# Altium PCB MB525.PCBDOC (part 1 of 3)
Units mil, origin at the board's own origin, x right, y up, seen from the top; angles counter-clockwise.
Board outline 4505 x 6805 mil, 4 copper layers (TopLayer, GND, VCC, BottomLayer); 281 components, 230 nets, 1107 pads, 580 vias.
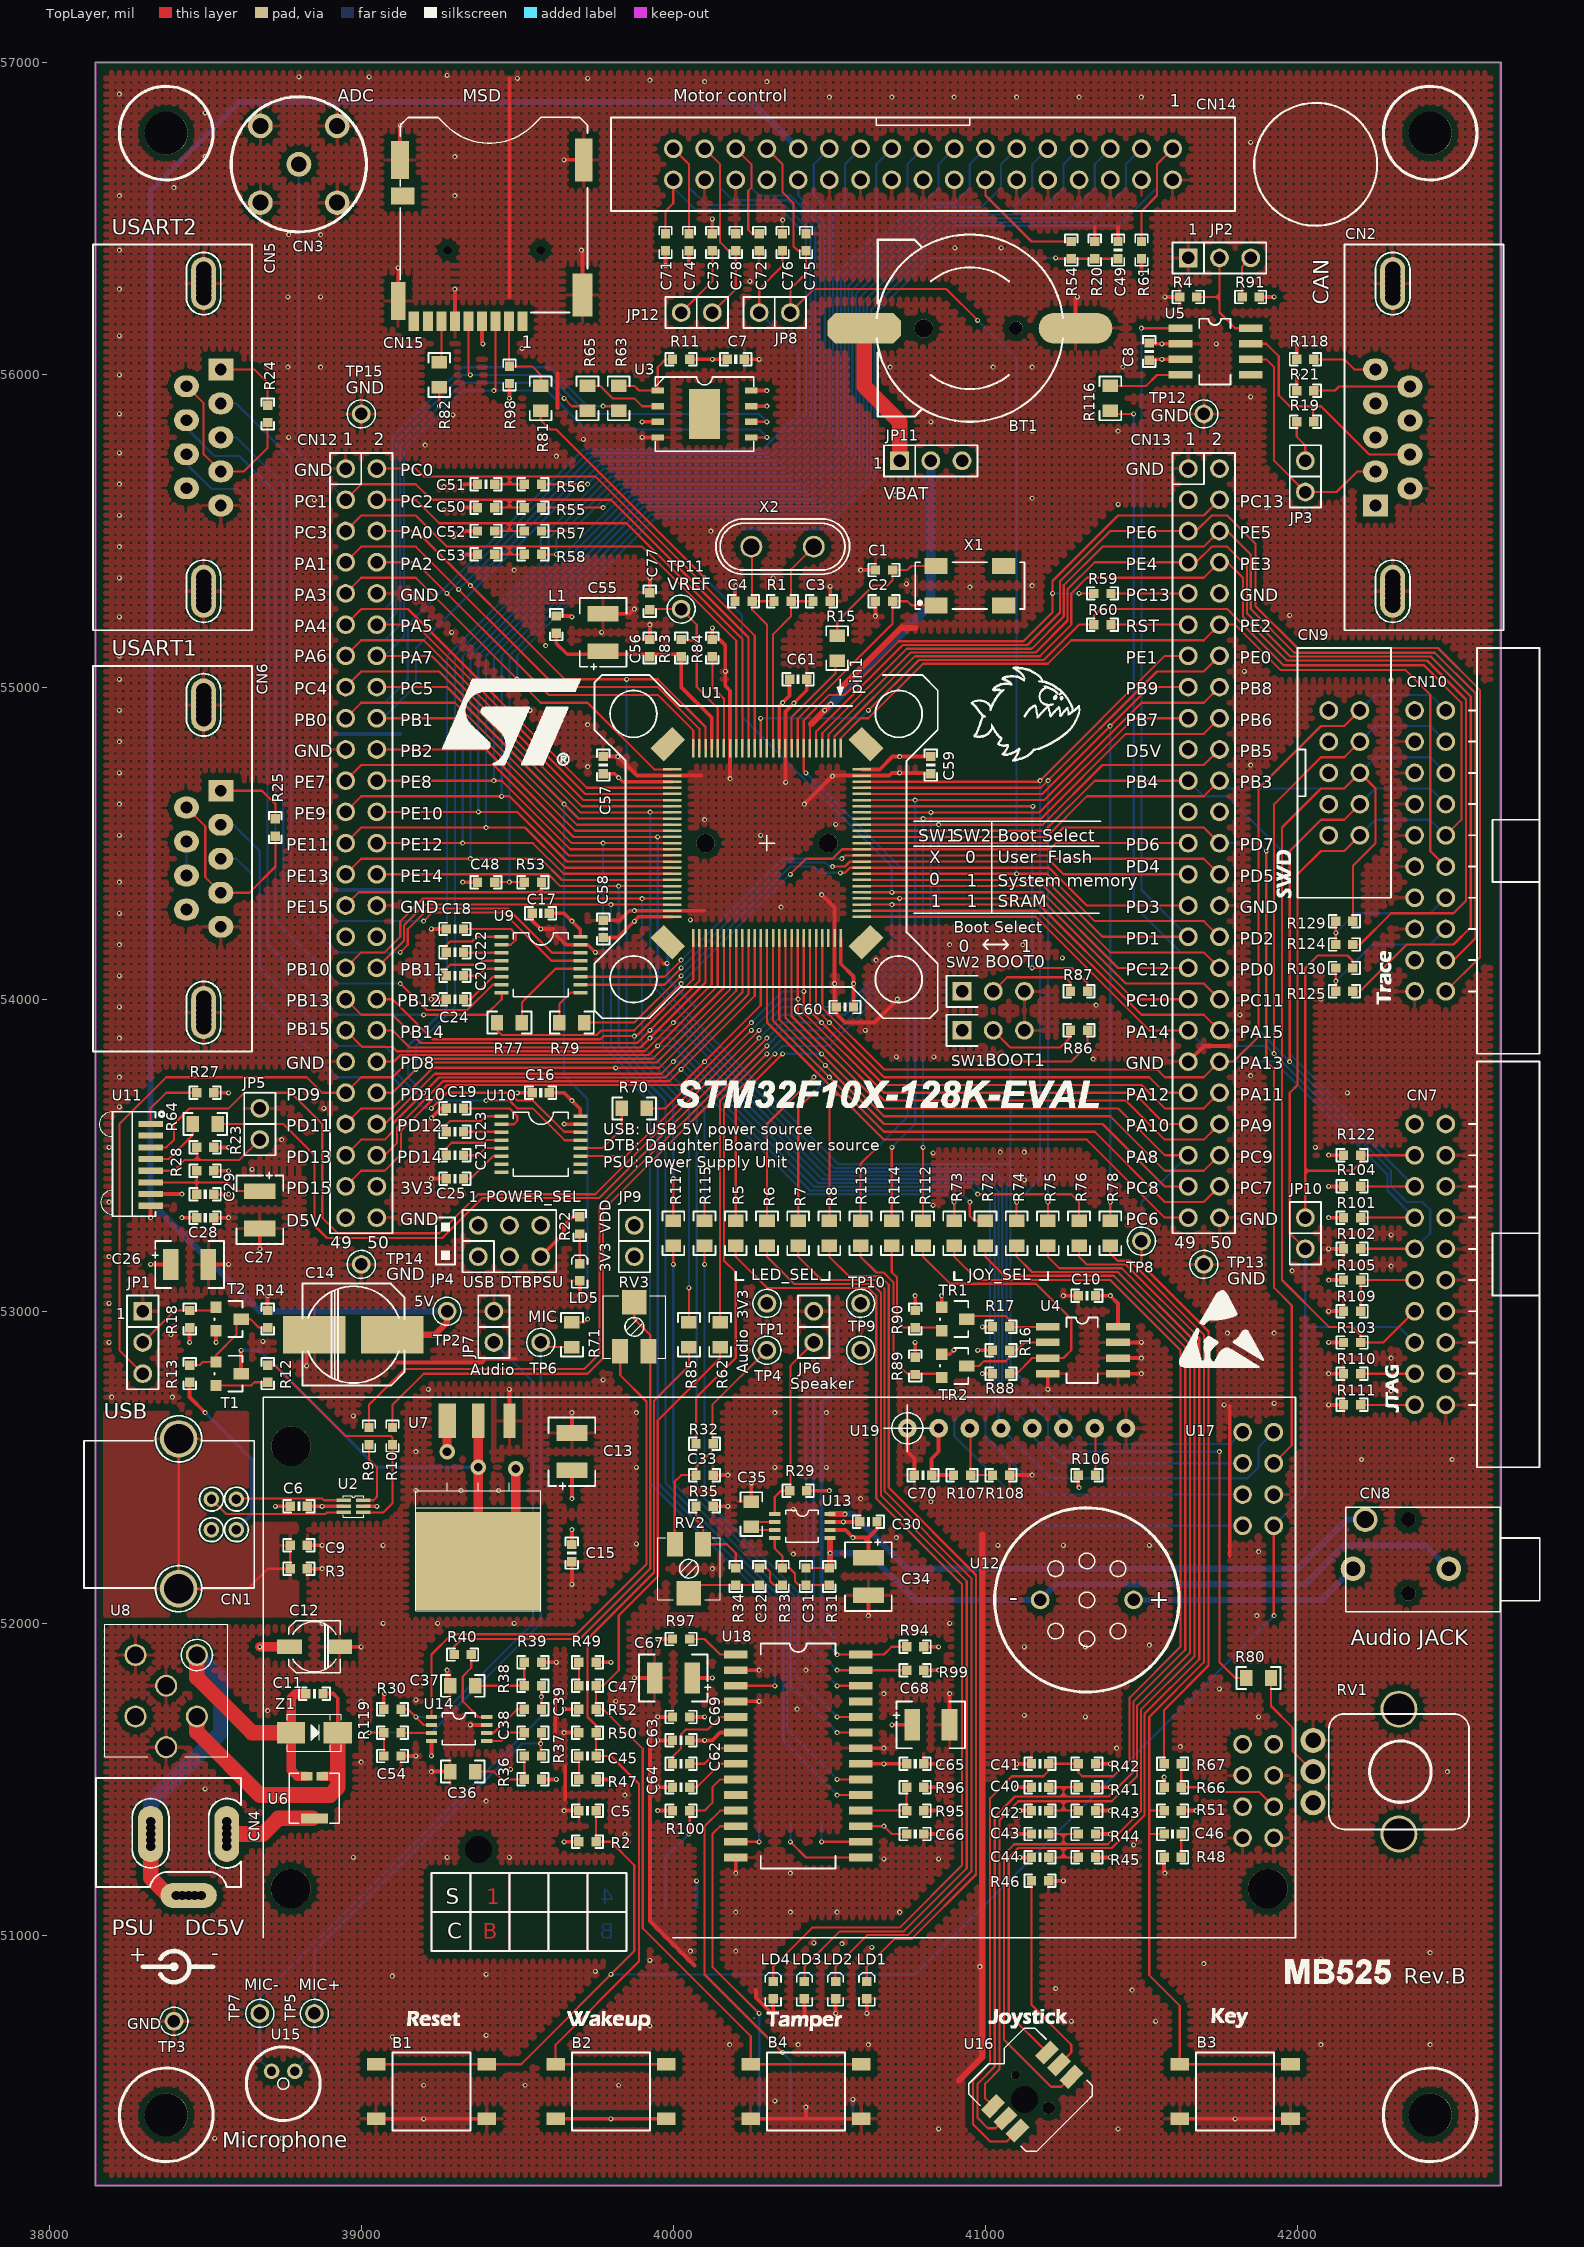
[diagram p0: TopLayer view]
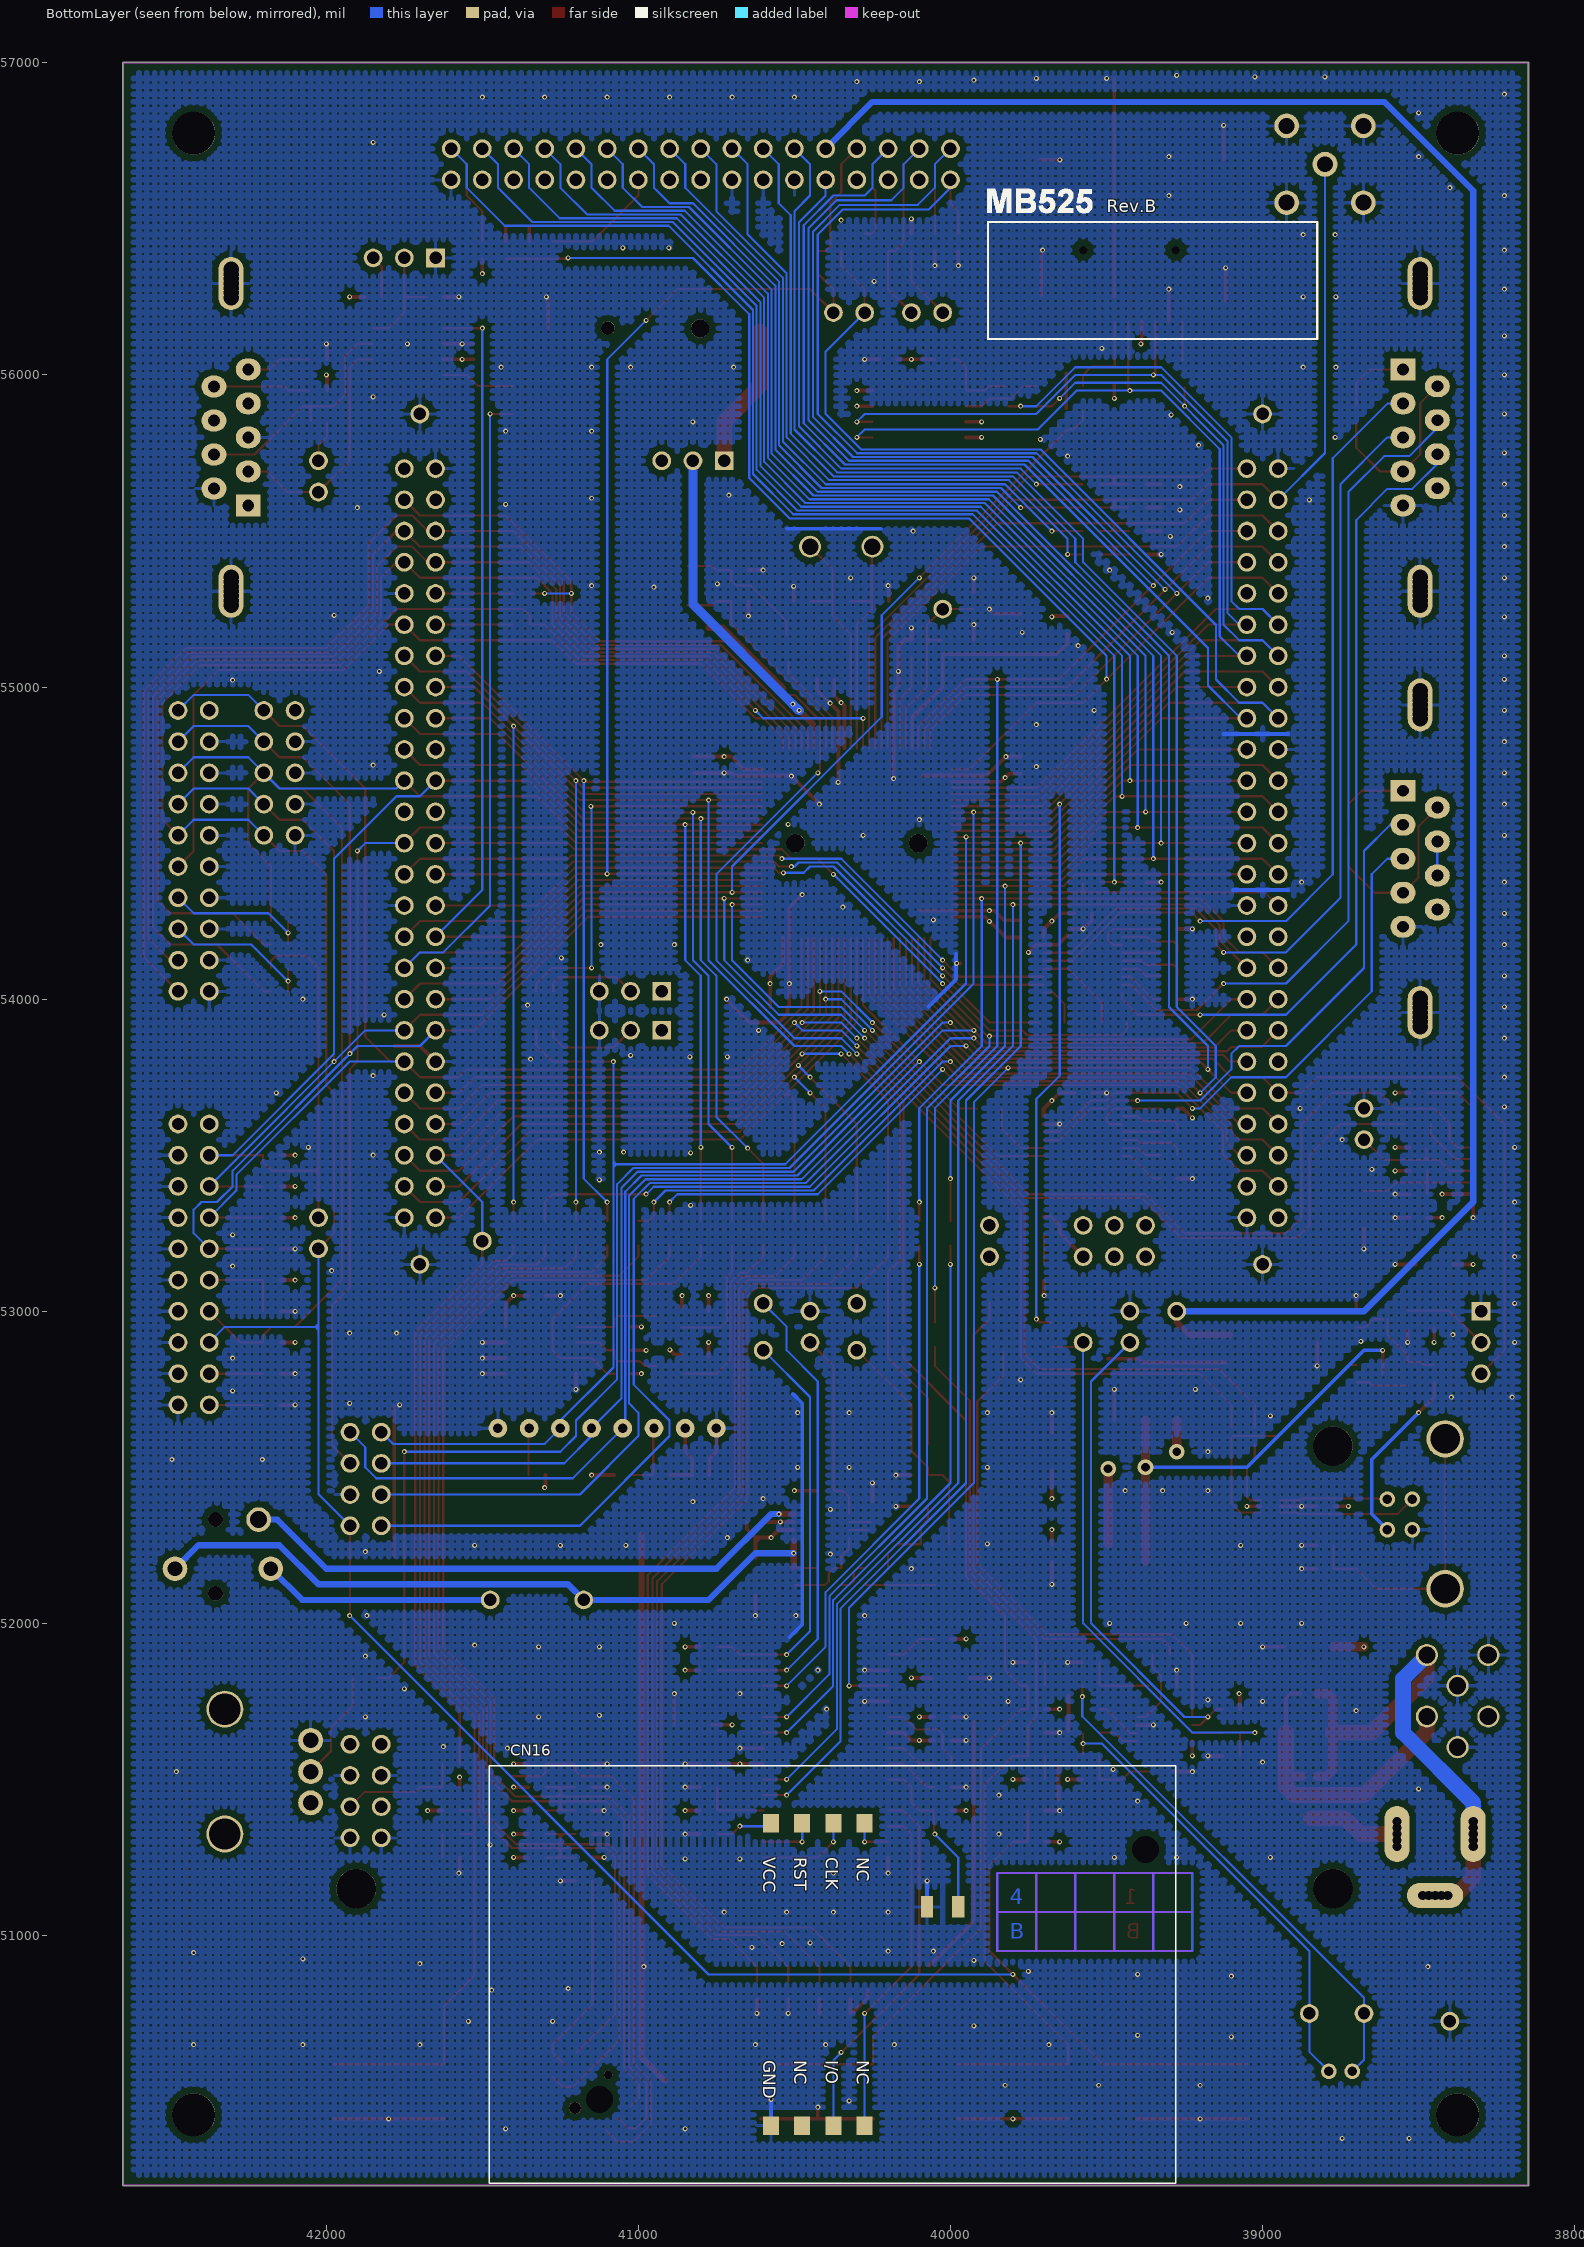
[diagram p1: BottomLayer view, seen from below]
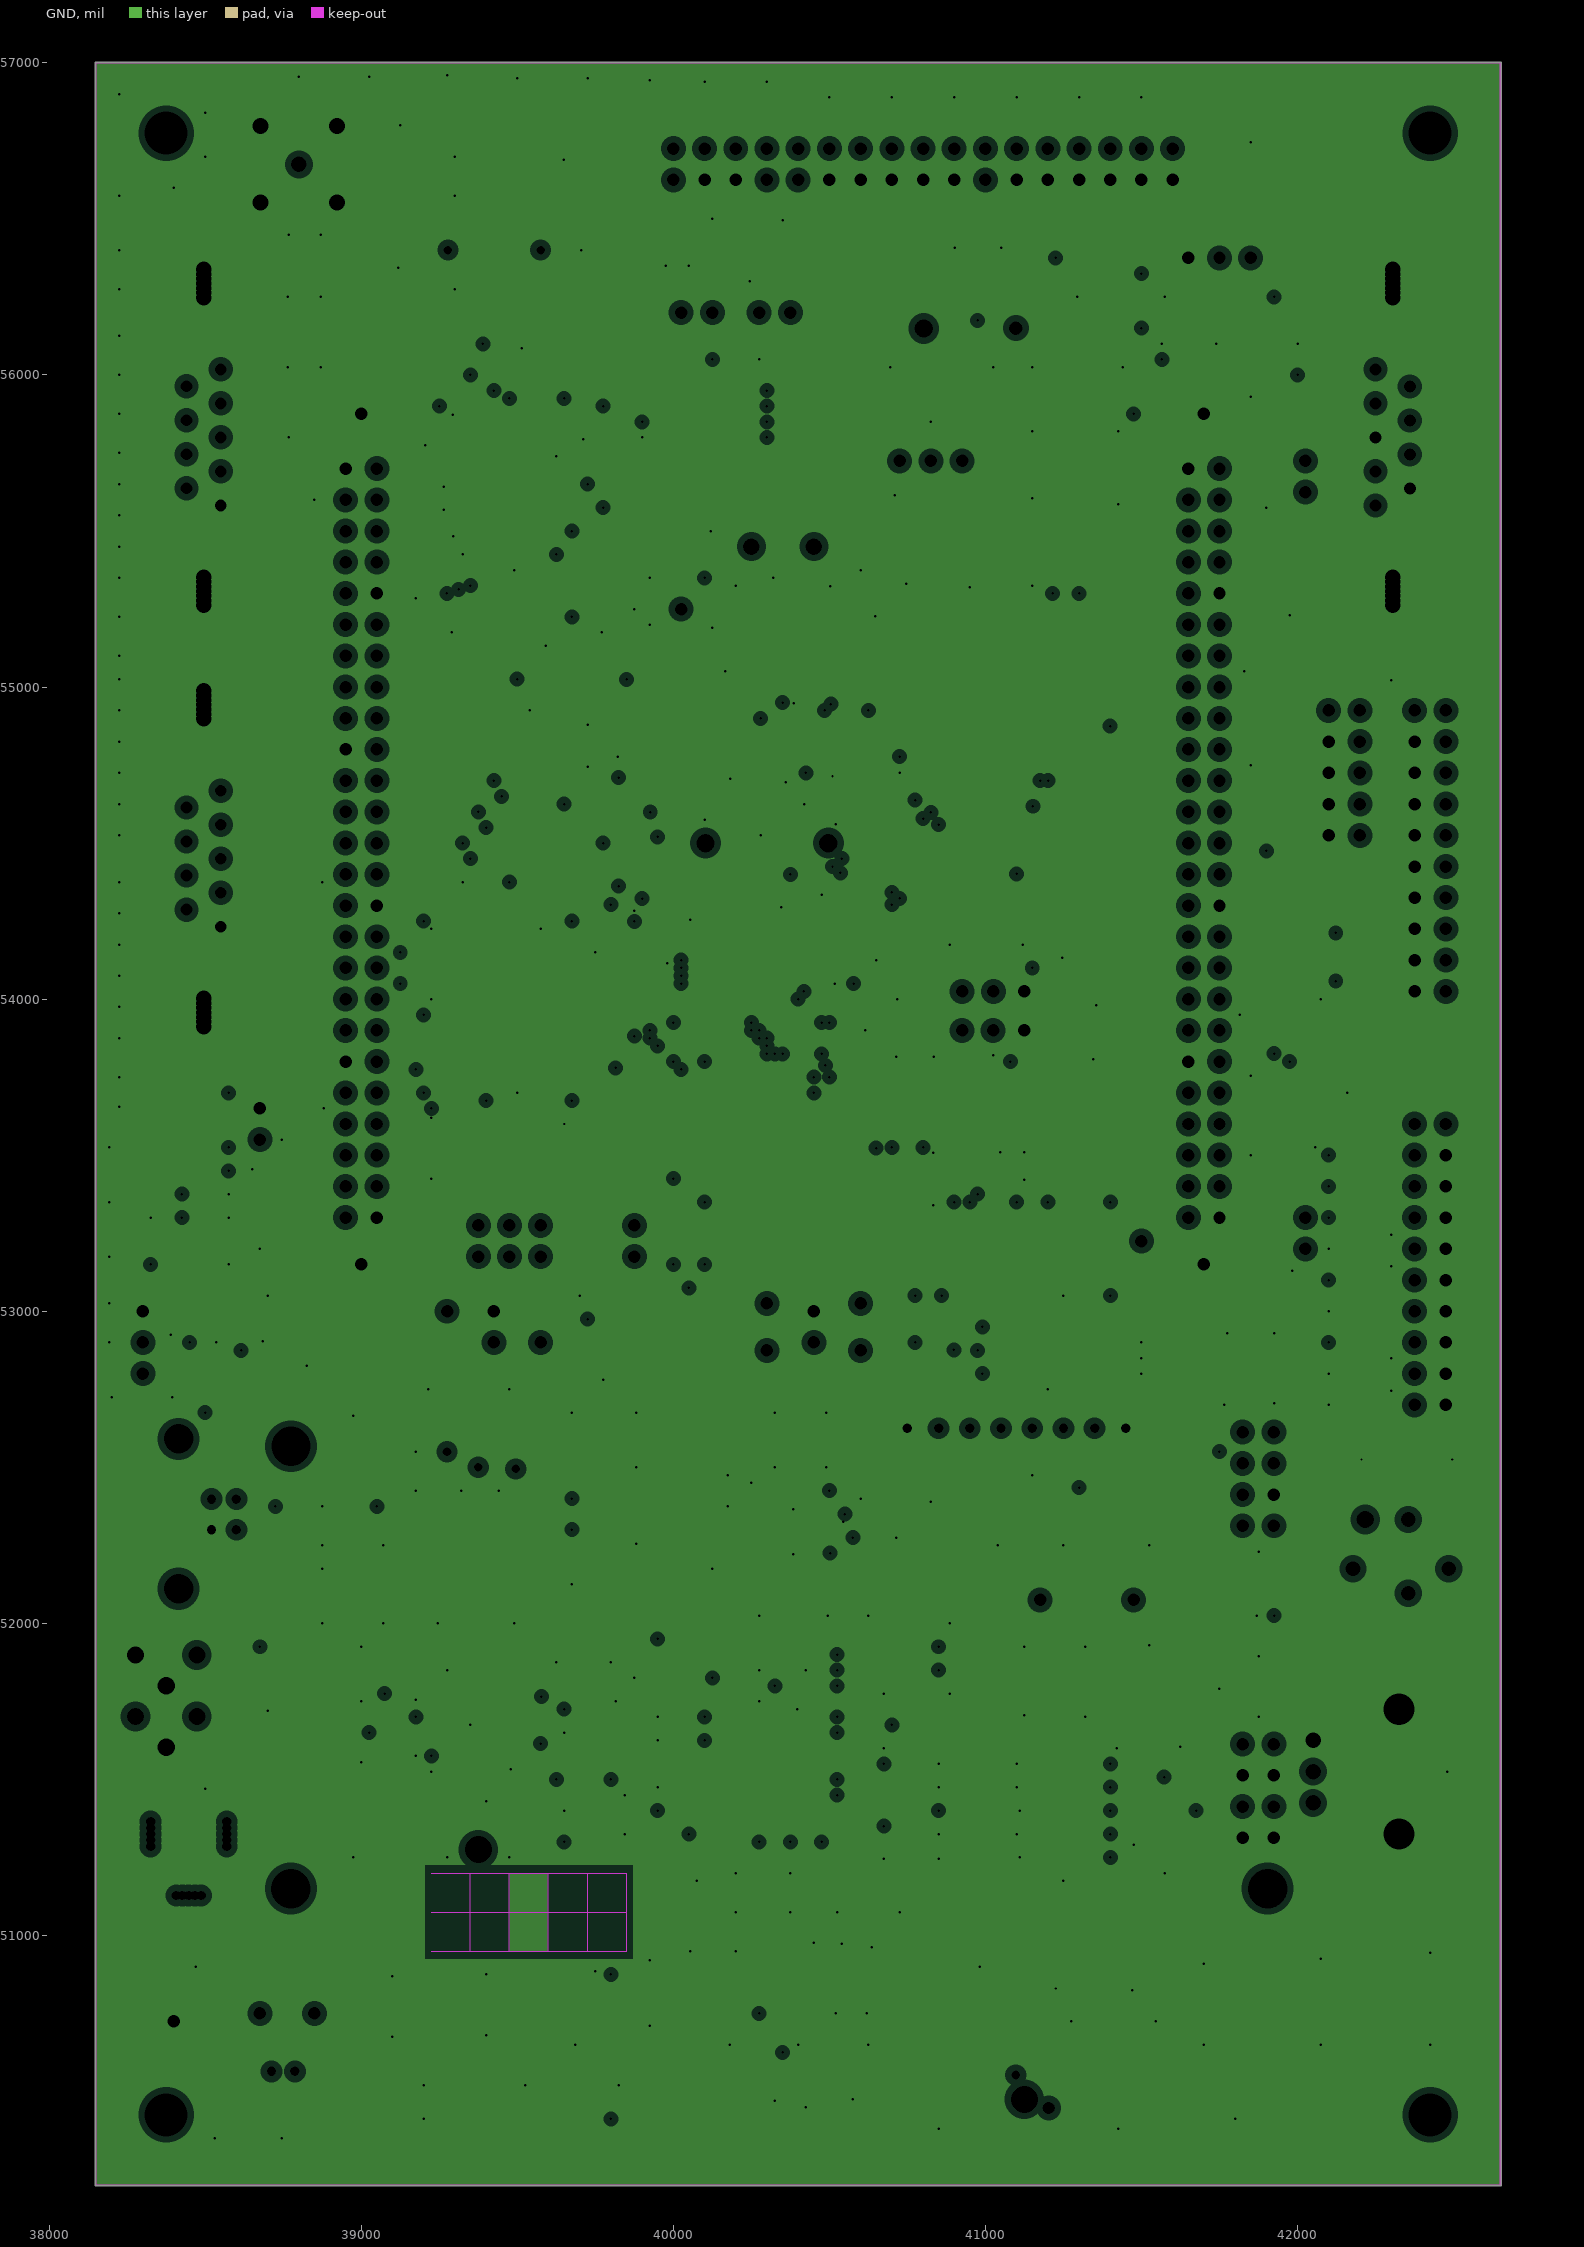
[diagram p2: GND, clearances drawn from the general rule]
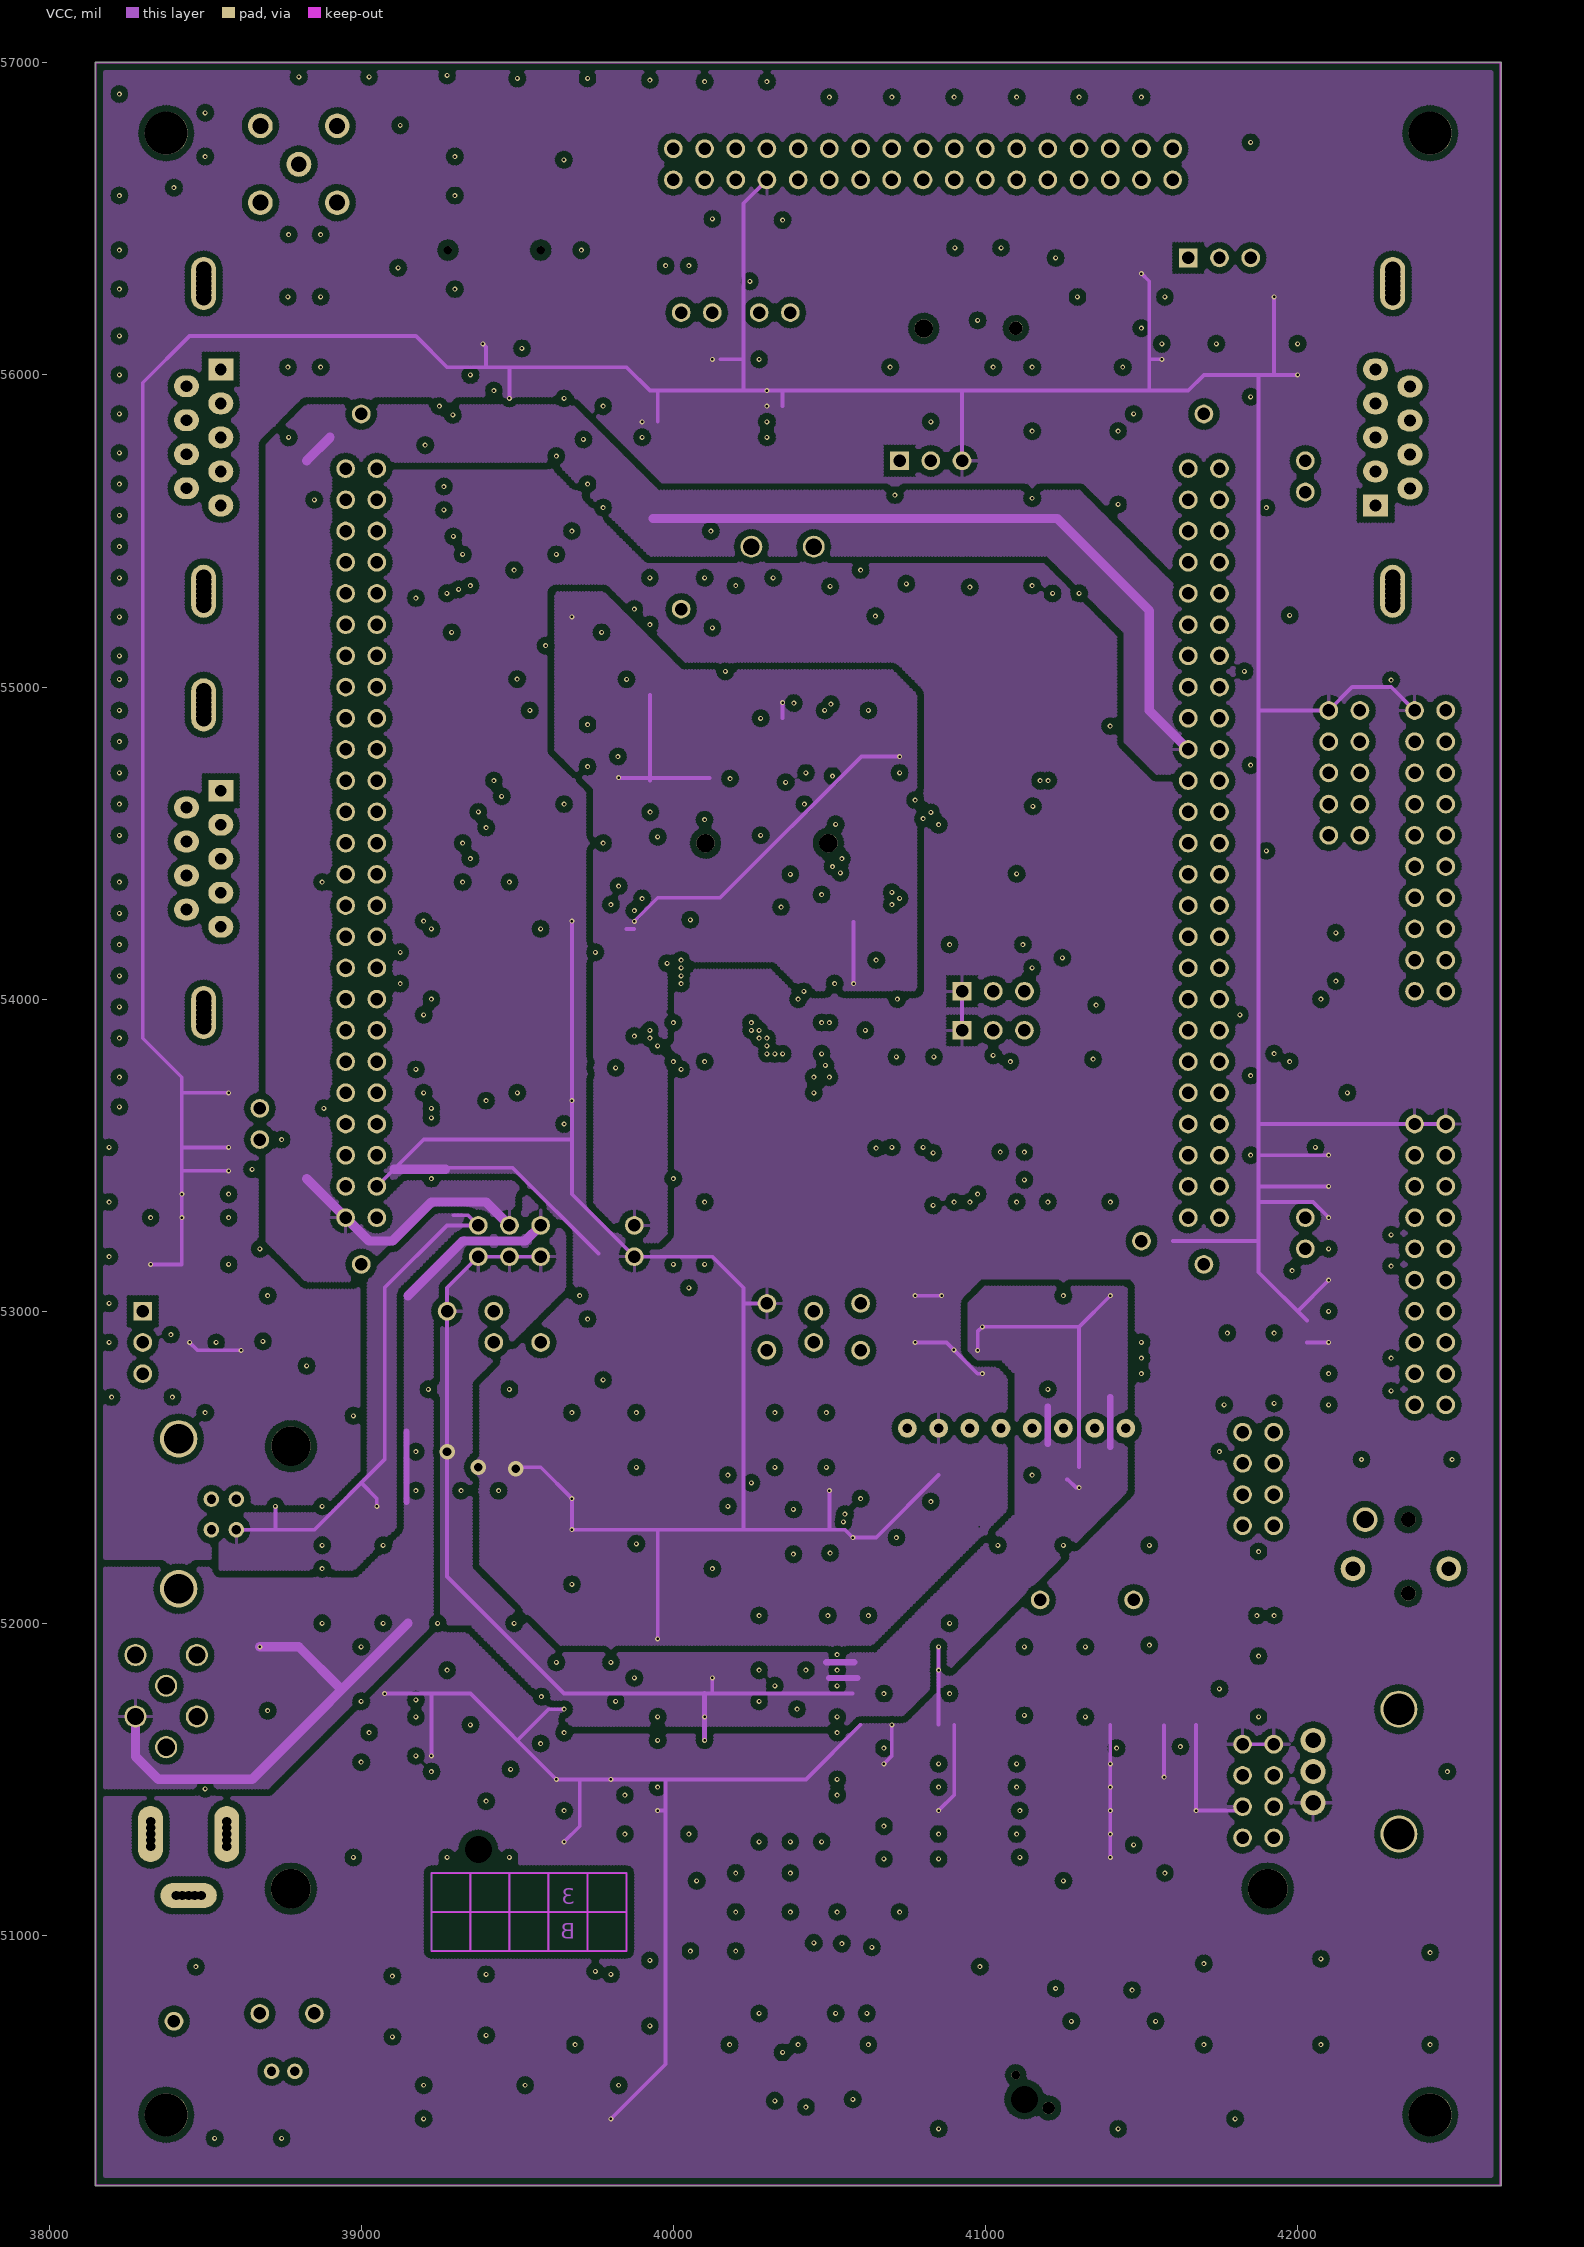
[diagram p3: VCC]

## Layer stack, top to bottom
TopLayer: signal copper 1.4
Dielectric: core 12.6, FR-4, Dk 4.8
GND: plane copper 1.4, net GND
Dielectric: prepreg 12.6, FR-4, Dk 4.8
VCC: signal copper 1.4
Dielectric: core 12.6, FR-4, Dk 4.8
BottomLayer: signal copper 1.4

## Board outline
38147.5,50197.5 42652.5,50197.5 42652.5,57002.5 38147.5,57002.5

## Design rules (kind name [scope] priority, off if disabled: settings)
Clearance Clearance_1 [(InPoly)] p1: gap=20
Clearance [All] p2: gap=5
ComponentClearance [All] p1 off: gap=10 collisioncheckmode=0
PlaneClearance [All] p1: clearance=20
PlaneConnect [All] p1: planeconnectstyle=Relief reliefexpansion=20 reliefentries=4 reliefconductorwidth=10 reliefairgap=10
PolygonConnect [All] p1: connectstyle=Relief reliefconductorwidth=10 reliefentries=4 polygonreliefangle="90 Angle"
RoutingLayers [All] p1: top layer_v5=TRUE mid layer 1_v5=FALSE bottom layer_v5=TRUE
RoutingVias [All] p1: holewidth=8 width=16 viastyle="Through Hole" minholewidth=5 minwidth=8 maxholewidth=28 maxwidth=50
SolderMaskExpansion [All] p1: expansion=4
TestPointUsage [All] p1: valid=0 allowmultiple=FALSE
Testpoint [All] p1: side=15 testpointundercomponent=TRUE minsize=40 maxsize=100 preferedsize=60 minholesize=20 maxholesize=40 preferedholesize=32 testpointgrid=1 style=1023 order=1234567890
Width Width_6 [InNet('U5V')] p1: maxlimit=300 minlimit=7 preferedwidth=12
Width Width_5 [InNet('GND')] p2: maxlimit=300 minlimit=7 preferedwidth=12
Width Width_8 [InNet('VDDA')] p3: maxlimit=300 minlimit=7 preferedwidth=12
Width Width_7 [InNet('VDD')] p4: maxlimit=300 minlimit=7 preferedwidth=12
Width Width_4 [InNet('E5V')] p5: maxlimit=300 minlimit=7 preferedwidth=20
Width Width_1 [InNet('+3V3')] p6: maxlimit=300 minlimit=7 preferedwidth=12
Width Width_2 [InNet('+5V')] p7: maxlimit=300 minlimit=7 preferedwidth=20
Width Width_3 [InNet('D5V')] p8: maxlimit=300 minlimit=7 preferedwidth=30
Width [All] p9: maxlimit=300 minlimit=5 preferedwidth=7
14 further rules are at their usual default settings.

## Classes and differential pairs
component class Debug: CN7 CN9 CN10 CN11 JP10 R101 R102 R103 R104 R105 R109 R110 R111
component class SD&SmartCard: C62 C63 C64 C65 C66 C67 C68 C69 CN15 CN16 R81 R82 R94 R95 R96 R97 R98 R99 R100 R115 R117 TP9 TP10 U18
component class MC&Extension: C48 C49 C50 C51 C52 C53 C71 C72 C73 C74 C75 CN12 CN13 CN14 JP8 R53 R54 R55 R56 R57 R58 R59 R60 R61
component class LCD&Joystick: B1 B2 B3 C40 C41 C42 C43 C44 C45 C46 C47 C70 R41 R42 R43 R44 R45 R46 R47 R48 R49 R50 R51 R52 R62 R72 R73 R74 R75 R76 R78 R85 R92 R93 R106 R107 R108 R120 R121 U16 U17 U19
component class Audio: C30 C31 C32 C33 C34 C35 C36 C37 C38 C39 C54 CN8 JP6 JP7 R29 R30 R31 R32 R33 R34 R35 R36 R37 R38 R39 R40 R71 R119 RV2 RV3 TP4 TP5 TP6 TP7 U12 U13 U14 U15
component class RS232&IrDA: C16 C17 C18 C19 C20 C21 C22 C23 C24 C25 C26 C27 C28 C29 CN5 CN6 JP5 R23 R24 R25 R27 R28 R64 R70 R77 R79 U9 U10 U11
component class Power: C11 C12 C13 C14 C15 CN4 JP4 LD5 R22 TP1 TP2 TP3 U6 U7 U8 Z1
component class Peripherals: C6 C7 C8 C9 C10 CN1 CN2 CN3 JP1 JP2 JP3 LD1 LD2 LD3 LD4 R3 R4 R5 R6 R7 R8 R9 R10 R11 R12 R13 R14 R16 R17 R18 R19 R20 R21 R63 R65 R66 R67 R68 R69 R80 R88 R89 R90 R91 R112 R113 R114 R116 R118 RV1 T1 T2 TR1 TR2 U2 U3 U4 U5
component class MCU: B1 BT1 C1 C2 C3 C4 C5 C55 C56 C57 C58 C59 C60 C61 JP9 L1 R1 R2 R15 R26 R83 R84 R86 R87 SW1 SW2 TP8 U1 X1 X2
component class MotorCtrl: C48 C49 C50 C51 C52 C53 C71 C72 C73 C74 C75 C76 CN14 JP8 JP12 R20 R53 R54 R55 R56 R57 R58 R61
component class JTAG&SWD: CN7 CN9 CN10 JP10 R101 R102 R103 R104 R105 R109 R110 R111 R122 R124 R125 R129 R130
component class Extension: CN12 CN13 R59 R60
net class PA[0..15]: PA0 PA1 PA2 PA3 PA4 PA5 PA6 PA7 PA8 PA9 PA10 PA11 PA12 PA13 PA14 PA15 PA[0..15]0 PA[0..15]1 PA[0..15]2 PA[0..15]3 PA[0..15]4 PA[0..15]5 PA[0..15]6 PA[0..15]7 PA[0..15]8 PA[0..15]9 PA[0..15]10 PA[0..15]11 PA[0..15]12 PA[0..15]13 PA[0..15]14 PA[0..15]15
net class PB[0..15]: PB0 PB1 PB2 PB3 PB4 PB5 PB6 PB7 PB8 PB9 PB10 PB11 PB12 PB13 PB14 PB15 PB[0..15]0 PB[0..15]1 PB[0..15]2 PB[0..15]3 PB[0..15]4 PB[0..15]5 PB[0..15]6 PB[0..15]7 PB[0..15]8 PB[0..15]9 PB[0..15]10 PB[0..15]11 PB[0..15]12 PB[0..15]13 PB[0..15]14 PB[0..15]15
net class PC[0..15]: PC0 PC1 PC2 PC3 PC4 PC5 PC6 PC7 PC8 PC9 PC10 PC11 PC12 PC13 PC14 PC15 PC[0..15]0 PC[0..15]1 PC[0..15]2 PC[0..15]3 PC[0..15]4 PC[0..15]5 PC[0..15]6 PC[0..15]7 PC[0..15]8 PC[0..15]9 PC[0..15]10 PC[0..15]11 PC[0..15]12 PC[0..15]13 PC[0..15]14 PC[0..15]15
net class PD[0..15]: PD0 PD1 PD2 PD3 PD4 PD5 PD6 PD7 PD8 PD9 PD10 PD11 PD12 PD13 PD14 PD15 PD[0..15]0 PD[0..15]1 PD[0..15]2 PD[0..15]3 PD[0..15]4 PD[0..15]5 PD[0..15]6 PD[0..15]7 PD[0..15]8 PD[0..15]9 PD[0..15]10 PD[0..15]11 PD[0..15]12 PD[0..15]13 PD[0..15]14 PD[0..15]15
net class PE[0..15]: PE0 PE1 PE2 PE3 PE4 PE5 PE6 PE7 PE8 PE9 PE10 PE11 PE12 PE13 PE14 PE15 PE[0..15]0 PE[0..15]1 PE[0..15]2 PE[0..15]3 PE[0..15]4 PE[0..15]5 PE[0..15]6 PE[0..15]7 PE[0..15]8 PE[0..15]9 PE[0..15]10 PE[0..15]11 PE[0..15]12 PE[0..15]13 PE[0..15]14 PE[0..15]15

## Components (designator, comment, footprint, x,y, rotation, side; value= is the part's Value field where it differs from the comment)
B1 "RESET" PB10 39225,50500 r90 top
B2 "WKUP" PB10 39800,50500 r90 top
B3 "USER" PB10 41800,50500 r90 top
B4 "Tamper" PB10 40425,50500 r90 top
BT1 "CR1220 holder" LI1220_1 40950,56150 r270 top
C1 "10pF" 0603 40675,55375 r180 top
C2 "10pF" 0603 40675,55275 r180 top
C3 "20pF" 0603 40475,55275 r0 top
C4 "20pF" 0603 40225,55275 r180 top
C5 "100nF" 0603P 39725,51400 r0 top
C6 "100nF" 0603P 38800,52375 r180 top
C7 "100nF" 0603P 40200,56050 r180 top
C8 "100nF" 0603P 41525,56075 r270 top
C9 "4.7nF" 0603 38800,52250 r180 top
C10 "100nF" 0603P 41325,53050 r0 top
C11 "100nF" 0603P 38850,51775 r180 top
C12 "10uF" C160M 38850,51925 r180 top
C13 "10uF" TAN-B 39675,52550 r90 top
C14 "470uF" C310M 38975,52925 r0 top
C15 "100nF" 0603P 39675,52225 r270 top
C16 "100nF" 0603P 39575,53700 r180 top
C17 "100nF" 0603P 39575,54275 r180 top
C18 "100nF" 0603P 39300,54225 r0 top
C19 "100nF" 0603P 39300,53650 r0 top
C20 "100nF" 0603P 39300,54075 r0 top
C21 "100nF" 0603P 39300,53500 r0 top
C22 "100nF" 0603P 39300,54150 r0 top
C23 "100nF" 0603P 39300,53575 r0 top
C24 "100nF" 0603P 39300,54000 r0 top
C25 "100nF" 0603P 39300,53425 r0 top
C26 "4.7uF" TAN-B 38450,53150 r0 top
C27 "4.7uF" TAN-B 38675,53325 r270 top
C28 "0.1uF" 0603P 38500,53300 r0 top
C29 "0.1uF" 0603P 38500,53375 r0 top
C30 "100nF" 0603P 40625,52325 r0 top
C31 "470pF" 0603 40425,52150 r90 top
C32 "150nF" 0603 40275,52150 r90 top
C33 "33nF" 0603 40100,52475 r180 top
C34 "100uF" TAN-B 40625,52150 r270 top
C35 "2.2uF" 0805 40250,52350 r180 top
C36 "2.2uF" 0805 39325,51525 r270 top
C37 "2.2uF" 0805 39325,51800 r270 top
C38 "1uF" 0603 39550,51650 r180 top
C39 "1uF" 0603 39550,51725 r180 top
C40 "100nF" 0603P 41175,51475 r0 top
C41 "100nF" 0603P 41175,51550 r0 top
C42 "100nF" 0603P 41175,51400 r0 top
C43 "100nF" 0603P 41175,51325 r0 top
C44 "100nF" 0603P 41175,51250 r0 top
C45 "100nF" 0603P 39725,51575 r0 top
C46 "100nF" 0603P 41600,51325 r180 top
C47 "100nF" 0603P 39725,51800 r0 top
C48 "1nF" 0603 39400,54375 r0 top
C49 "100nF" 0603P 41425,56400 r270 top
C50 "do not fit" 0603 39400,55575 r0 top
C51 "100nF" 0603P 39400,55650 r0 top
C52 "do not fit" 0603 39400,55500 r0 top
C53 "do not fit" 0603 39400,55425 r0 top
C54 "do not fit" 0603 39100,51575 r0 top
C55 "10uF" TAN-B 39775,55175 r90 top
C56 "10nF" 0603 39925,55125 r90 top
C57 "100nF" 0603P 39775,54750 r90 top
C58 "100nF" 0603P 39775,54225 r90 top
C59 "100nF" 0603P 40825,54750 r270 top
C60 "100nF" 0603P 40550,53975 r180 top
C61 "100nF" 0603P 40400,55025 r0 top
C62 "100nF" 0603P 40025,51550 r180 top
C63 "100nF" 0603P 40025,51625 r180 top
C64 "100nF" 0603P 40025,51475 r180 top
C65 "100nF" 0603P 40775,51550 r0 top
C66 "100nF" 0603P 40775,51325 r180 top
C67 "47uF" TAN-B 40000,51825 r180 top
C68 "47uF" TAN-B 40825,51675 r0 top
C69 "330nF" 0603 40025,51700 r180 top
C70 "100nF" 0603P 40800,52475 r180 top
C71 "do not fit" 0603 39975,56425 r90 top
C72 "do not fit" 0603 40275,56425 r90 top
C73 "10nF" 0603 40125,56425 r270 top
C74 "do not fit" 0603 40050,56425 r90 top
C75 "do not fit" 0603 40425,56425 r270 top
C76 "do not fit" 0603 40350,56425 r270 top
C77 "10nF" 0603 39925,55275 r90 top
C78 "do not fit" 0603 40200,56425 r270 top
CN1 "USB-typeB connector" USB-B 38600,52300 r270 top
CN2 "DB9-male CAN connector" DB9/M 42250,55800 r270 top
CN3 "VB334" VB334 38800,56675 r270 top
CN4 "DC-10B" DC10B 38325,51325 r0 top
CN5 "DB9-male UART2" DB9/M 38550,55800 r90 top
CN6 "DB9-male UART1" DB9/M 38550,54450 r90 top
CN7 "JTAG" IDC20L 42375,53600 r270 top locked
CN8 "ST-613" PJST-613 42650,52175 r180 top
CN9 "SWD" IDC10S 42100,54925 r0 top
CN10 "Trace" IDC20L 42375,54925 r270 top
CN12 "Header 25X2" 2*25P 38950,55700 r0 top
CN13 "Header 25X2" 2*25P 41650,55700 r0 top
CN14 "MC_connector" IDC34S 41600,56725 r270 top locked
CN15 "PJS008-2000" MSD(PJS008) 39575,56400 r90 top
CN16 "C816" SAM(C816) 40425,50875 r270 bottom
JP1 "" SIP3 38300,53000 r270 top
JP2 "" SIP3 41650,56375 r0 top
JP3 "" SIP2 42025,55725 r270 top
JP4 "" 2*3P 39375,53175 r90 top
JP5 "" SIP2 38675,53550 r90 top
JP6 "" SIP2 40450,52900 r90 top
JP7 "" SIP2 39425,52900 r90 top
JP8 "" SIP2 40375,56200 r180 top
JP9 "" SIP2 39875,53175 r90 top
JP10 "" SIP2 42025,53300 r270 top
JP11 "" SIP3 40725,55725 r0 top
JP12 "" SIP2 40125,56200 r180 top
L1 "BEAD" 0603 39625,55200 r270 top
LD1 "red" D0603 40620,50825 r0 top
LD2 "red" D0603 40520,50825 r0 top
LD3 "red" D0603 40420,50825 r0 top
LD4 "red" D0603 40320,50825 r0 top
LD5 "red" D0603 39700,53125 r0 top
R1 "1M" 0603 40350,55275 r0 top
R2 "10K" 0603 39725,51300 r180 top
R3 "1M" 0603 38800,52175 r180 top
R4 "10K" 0603 41650,56250 r180 top
R5 "600" 0805 40200,53250 r180 top
R6 "600" 0805 40300,53250 r180 top
R7 "600" 0805 40400,53250 r180 top
R8 "600" 0805 40500,53250 r180 top
R9 "22" 0603 39025,52600 r90 top
R10 "22" 0603 39100,52600 r90 top
R11 "10K" 0603 40025,56050 r0 top
R12 "1.5K" 0603 38700,52800 r90 top
R13 "10K" 0603 38450,52800 r90 top
R14 "36K" 0603 38700,52975 r90 top
R15 "0" 0805 40525,55125 r0 top
R16 "4K7" 0603 41050,52875 r180 top
R17 "4K7" 0603 41050,52950 r180 top
R18 "47K" 0603 38450,52975 r270 top
R19 "120" 0603 42025,55850 r180 top
R20 "100K" 0603 41350,56400 r270 top
R21 "do not fit" 0603 42025,55950 r0 top
R22 "300" 0603 39700,53275 r90 top
R23 "10K" 0603 38500,53525 r0 top
R24 "do not fit" 0603 38700,55875 r90 top
R25 "do not fit" 0603 38725,54550 r90 top
R27 "5" 0603 38500,53700 r180 top
R28 "47" 0603 38500,53450 r180 top
R29 "10K" 0603 40400,52425 r0 top
R30 "10K" 0603 39100,51725 r0 top
R31 "100K" 0603 40500,52150 r90 top
R32 "1.2K" 0603 40100,52575 r0 top
R33 "22K" 0603 40350,52150 r90 top
R34 "0(don't solder)" 0603 40200,52150 r270 top
R35 "0" 0603 40100,52375 r180 top
R36 "1K" 0603 39550,51500 r0 top
R37 "1K" 0603 39550,51575 r0 top
R38 "1K" 0603 39550,51800 r0 top
R39 "1K" 0603 39550,51875 r180 top
R40 "1K" 0603 39325,51900 r0 top
R41 "10K" 0603 41325,51475 r180 top
R42 "10K" 0603 41325,51550 r0 top
R43 "10K" 0603 41325,51400 r0 top
R44 "10K" 0603 41325,51325 r0 top
R45 "10K" 0603 41325,51250 r0 top
R46 "100" 0603 41175,51175 r180 top
R47 "100" 0603 39725,51500 r180 top
R48 "100" 0603 41600,51250 r0 top
R49 "100" 0603 39725,51875 r180 top
R50 "4K7" 0603 39725,51650 r180 top
R51 "4K7" 0603 41600,51400 r0 top
R52 "4K7" 0603 39725,51725 r180 top
R53 "0" 0603 39550,54375 r0 top
R54 "0" 0603 41275,56400 r270 top
R55 "0" 0603 39550,55575 r0 top
R56 "0" 0603 39550,55650 r180 top
R57 "0" 0603 39550,55500 r0 top
R58 "0" 0603 39550,55425 r0 top
R59 "820" 0603 41375,55300 r0 top
R60 "820" 0603 41375,55200 r180 top
R61 "3.3K" 0603 41500,56400 r270 top
R62 "0" 0805 40150,52925 r180 top
R63 "0" 0805 39825,55925 r0 top
R64 "0" 0805 38500,53600 r90 top
R65 "0" 0805 39725,55925 r180 top
R66 "0" 0603 41600,51475 r180 top
R67 "do not fit" 0603 41600,51550 r0 top
R70 "0" 0805 39875,53650 r90 top
R71 "0" 0805 39675,52925 r0 top
R72 "0" 0805 41000,53250 r180 top
R73 "0" 0805 40900,53250 r180 top
R74 "0" 0805 41100,53250 r180 top
R75 "0" 0805 41200,53250 r180 top
R76 "0" 0805 41300,53250 r180 top
R77 "0" 0805 39475,53925 r270 top
R78 "0" 0805 41400,53250 r180 top
R79 "0" 0805 39675,53925 r90 top
R80 "0" 0805 41875,51825 r90 top
R81 "0" 0805 39575,55925 r0 top
R82 "0" 0805 39250,56000 r180 top
R83 "47" 0603 40025,55125 r270 top
R84 "0" 0603 40125,55125 r270 top
R85 "0" 0805 40050,52925 r180 top
R86 "100K" 0603 41300,53900 r180 top
R87 "100K" 0603 41300,54025 r180 top
R88 "4K7" 0603 41050,52800 r180 top
R89 "4K7" 0603 40775,52825 r90 top
R90 "4K7" 0603 40775,52975 r90 top
R91 "2K2" 0603 41850,56250 r0 top
R94 "10K" 0603 40775,51925 r180 top
R95 "10K" 0603 40775,51400 r180 top
R96 "10K" 0603 40775,51475 r0 top
R97 "4K7" 0603 40025,51950 r0 top
R98 "4K7" 0603 39475,56000 r270 top
R99 "10K" 0603 40775,51850 r180 top
R100 "100K" 0603 40025,51400 r0 top
R101 "10K" 0603 42175,53300 r180 top
R102 "10K" 0603 42175,53200 r0 top
R103 "10K" 0603 42175,52900 r180 top
R104 "10K" 0603 42175,53400 r180 top
R105 "do not fit" 0603 42175,53100 r180 top
R106 "0" 0603 41325,52475 r0 top
R107 "do not fit" 0603 40925,52475 r180 top
R108 "do not fit" 0603 41050,52475 r180 top
R109 "10K" 0603 42175,53000 r0 top
R110 "10K" 0603 42175,52800 r180 top
R111 "10K" 0603 42175,52700 r180 top
R112 "0" 0805 40800,53250 r180 top
R113 "0" 0805 40600,53250 r180 top
R114 "0" 0805 40700,53250 r180 top
R115 "0" 0805 40100,53250 r180 top
R116 "0" 0805 41400,55925 r0 top
R117 "0" 0805 40000,53250 r0 top
R118 "0" 0603 42025,56050 r0 top
R119 "0" 0603 39100,51650 r0 top
R122 "10K" 0603 42175,53500 r180 top
R124 "0" 0603 42150,54175 r0 top
R125 "0" 0603 42150,54025 r0 top
R129 "do not fit" 0603 42150,54250 r0 top
R130 "do not fit" 0603 42150,54100 r0 top
RV1 "10K" ADJRH 42050,51525 r270 top
RV2 "50K" 3314-J 40050,52175 r0 top
RV3 "20K" 3314-J 39875,52950 r180 top
SW1 "" SIP3 40925,53900 r0 top
SW2 "" SIP3 40925.14,54025.14 r0 top
T1 "9013" SOT-23 38575,52800 r270 top
T2 "9013" SOT-23 38575,52975 r270 top
TP1 "3V3" TP 40300,53025 r0 top
TP2 "5V" TP 39275,53000 r180 top
TP3 "Ground" TP 38400,50725 r180 top
TP4 "Audio" TP 40300,52875 r90 top
TP5 "MIC+" TP 38850,50750 r270 top
TP6 "MIC_OUT" TP 39575,52900 r0 top
TP7 "MIC-" TP 38675,50750 r90 top
TP8 "MCO" TP 41500,53225 r180 top
TP9 "AUX2" TP 40600,52875 r180 top
TP10 "AUX1" TP 40600,53025 r180 top
TP11 "VREF" TP 40025,55250 r0 top
TP12 "GND" TP 41700,55875 r0 top
TP13 "GND" TP 41700,53150 r0 top
TP14 "GND" TP 39000,53150 r0 top
TP15 "GND" TP 39000,55875 r0 top
TR1 "BSS123" SOT-23 40900,52975 r270 top
TR2 "BSS123" SOT-23 40900,52825 r270 top
U1 "STM32F103VBH6" TQFP100 40300,54500 r270 top
U2 "USBLC6-2P6" SOT-666 38975,52375 r0 top
U3 "M25P64-VME6G" VDFPN8(8*6) 40100,55875 r0 top
U4 "STLM75M2E" SO8 41200,52950 r270 top
U5 "SN65HVD230" SO8 41625,56150 r270 top
U6 "ZEN056V130A24LS" polyzen 38850,51375 r90 top
U7 "LD1086D2M33" D2PAK/A 39375,52200 r90 top
U8 "BNX002-01" BNX001 38375,51800 r270 top
U9 "ST3232ECTR" TSSOP16 39450,54200 r0 top
U10 "ST3232ECTR" TSSOP16 39450,53625 r0 top
U11 "TFDU4300" IR_VISHAY3 38325,53600 r180 top
U12 "KDMG15008-03" KS1508 41325,52075 r180 top
U13 "TS4871IST" TSSOP8 40325,52350 r0 top
U14 "MAX4061EUA+" tssop8 39225,51700 r0 top
U15 "KECG2740TBL" KEC2740 38750,50525 r270 top
U16 "MT008-A" JOY 41150,50500 r45 top
U17 "Color LCD module" AM240320A 41698.94,52612.72 r0 top
U18 "ST8024CDR" SO28 40200,51900 r0 top
U19 "HXM122032-GB1 (do not fit)" LCD12232-GB1 40750,52625 r0 top
X1 "MC306_32KHz" SM8 40950,55325 r0 top
X2 "8MHz (with socket)" XTAL1 40250,55450 r180 top
Z1 "SMAJ5.0A-TR" 1R1C 38850,51650 r270 top

## Footprints (in the part's own frame and the unit in brackets; to place one, negate y for a bottom-side part, rotate by r counter-clockwise, add the part's x,y. Pads: shape width x height; smd on the part's side, far side on the other; paste and mask are expansions set on the pad)
1R1C [mm]
  rect 1.75x2.3 smd: 1(0,-1.9) 2(0,1.9)
  silkscreen extent -1.5,-2.2 1.5,2.2
2*3P [mil]
  round 60 hole 40: 1(0,0) 2(100,0) 3(0,-100) 4(100,-100) 5(0,-200) 6(100,-200)
  silkscreen extent -50,-250 150,50
2*25P [mil]
  round 60 hole 40: 1(0,0) 2(100,0) 3(0,-100) 4(100,-100) 5(0,-200) 6(100,-200) 7(0,-300) 8(100,-300) 9(0,-400) 10(100,-400) 11(0,-500) 12(100,-500) 13(0,-600) 14(100,-600) 15(0,-700) 16(100,-700) 17(0,-800) 18(100,-800) 19(0,-900) 20(100,-900) 21(0,-1000) 22(100,-1000) 23(0,-1100) 24(100,-1100) 25(0,-1200) 26(100,-1200) 27(0,-1300) 28(100,-1300) 29(0,-1400) 30(100,-1400) 31(0,-1500) 32(100,-1500) 33(0,-1600) 34(100,-1600) 35(0,-1700) 36(100,-1700) 37(0,-1800) 38(100,-1800) 39(0,-1900) 40(100,-1900) 41(0,-2000) 42(100,-2000) 43(0,-2100) 44(100,-2100) 45(0,-2200) 46(100,-2200) 47(0,-2300) 48(100,-2300) 49(0,-2400) 50(100,-2400)
  silkscreen extent -50,-2450 150,50
0603 [mil]
  rect 30x30 smd: 1(-27.5,0) 2(27.5,0)
  silkscreen extent -50,-20 50,20
0603P [mil]
  rect 30x30 smd: 1(-27.5,0) 2(27.5,0)
  silkscreen extent -50,-20 50,20
0805 [mil]
  rect 50x40 smd: 1(0,40) 2(0,-40)
  silkscreen extent -35,-70 35,70
3314-J [mm]
  rect 1.3x2 smd: 1(-1.15,2) 3(1.15,2)
  rect 2x2 smd: 2(0,-2)
  silkscreen extent -2.54,-2.54 2.54,2.54
ADJRH [mil]
  round 118.11 hole 100: 0(-200,275) 0(200,275)
  round 80 hole 50: 1(-100,0) 2(0,0) 3(100,0)
  silkscreen extent -185,50 185,500
AM240320A [mil]
  round 125.98 hole 125.98 unplated: 0(-2923.94,-1462.72) 0(-2923.94,-1462.72) 0(-2923.94,-45) 0(205.98,-1462.72)
  round 60 hole 40: 1(125,0) 2(225,0) 3(125,-100) 4(225,-100) 5(125,-200) 6(225,-200) 7(125,-300) 8(225,-300) 9(125,-1000) 10(225,-1000) 11(125,-1100) 12(225,-1100) 13(125,-1200) 14(225,-1200) 15(125,-1300) 16(225,-1300)
  silkscreen extent -3013,-1620 295,112
BNX001 [mm]
  round 1.8 hole 1.4: 1(2.5,2.5) 2(-2.5,2.5) 3(2.5,-2.5) 4(0,0) 5(5,0) 6(-2.5,-2.5)
  silkscreen extent -5,-5 5.76,5
C160M [mil]
  rect 80x47.24 smd: 1(80,0) 2(-80,0)
  silkscreen extent -83,-83 83,83
C310M [mil]
  rect 200x120 smd paste-39.37 mask-39.37: 1(125,0) 2(-125,0)
  silkscreen extent -163,-163 163,163
D2PAK/A [mm]
  rect 2.8x1 smd: 1(11.4,-2.54) 2(11.4,0)
  rect 8x10.2 smd: 2(0,0)
  rect 2.8x1.42 smd: 3(11.4,2.54)
  silkscreen extent -4.06,-5.08 6.35,5.08
D0603 [mil]
  rect 30x30 smd: 1(0,27.5) 2(0,-27.5)
  silkscreen extent -25,-50 25,55
DB9/M [mil]
  round 50 hole 50: 0(-538,55) 0(-523,55) 0(-508,55) 0(-493,55) 0(-478,55) 0(-463,55) 0(-448,55) 0(448,55) 0(463,55) 0(478,55) 0(493,55) 0(508,55) 0(523,55) 0(538,55)
  oval 170x80 hole 50: 0(-493,55) 0(493,55)
  rect 70x80 hole 38: 1(218,0)
  oval 70x80 hole 38: 2(109,0) 3(0,0) 4(-109,0) 5(-218,0) 6(164,110) 7(55,110) 8(-54,110) 9(-163,110)
  silkscreen extent -618,-100 618,410
DC10B [mil]
  round 45 hole 30: 1(244.09,-40) 1(244.09,-20) 1(244.09,20) 1(244.09,40) 2(82.05,-196.85) 2(102.05,-196.85) 2(142.05,-196.85) 2(162.05,-196.85) 3(0,-40) 3(0,-20) 3(0,20) 3(0,40)
  oval 80x180 hole 30: 1(244.1,0) 3(0,0)
  oval 180x80 hole 30: 2(122.05,-196.85)
  silkscreen extent -175,-170 290,180
IDC10S [mil]
  round 60 hole 40: 1(0,0) 2(100,0) 3(0,-100) 4(100,-100) 5(0,-200) 6(100,-200) 7(0,-300) 8(100,-300) 9(0,-400) 10(100,-400)
  silkscreen extent -100,-600 200,200
IDC20L [mil]
  round 60 hole 40: 1(0,0) 2(0,100) 3(100,0) 4(100,100) 5(200,0) 6(200,100) 7(300,0) 8(300,100) 9(400,0) 10(400,100) 11(500,0) 12(500,100) 13(600,0) 14(600,100) 15(700,0) 16(700,100) 17(800,0) 18(800,100) 19(900,0) 20(900,100)
  silkscreen extent -200,175 1100,400
IDC34S [mil]
  round 60 hole 40: 1(0,0) 2(100,0) 3(0,-100) 4(100,-100) 5(0,-200) 6(100,-200) 7(0,-300) 8(100,-300) 9(0,-400) 10(100,-400) 11(0,-500) 12(100,-500) 13(0,-600) 14(100,-600) 15(0,-700) 16(100,-700) 17(0,-800) 18(100,-800) 19(0,-900) 20(100,-900) 21(0,-1000) 22(100,-1000) 23(0,-1100) 24(100,-1100) 25(0,-1200) 26(100,-1200) 27(0,-1300) 28(100,-1300) 29(0,-1400) 30(100,-1400) 31(0,-1500) 32(100,-1500) 33(0,-1600) 34(100,-1600)
  silkscreen extent -100,-1800 200,200
IR_VISHAY3 [mm]
  rect 2x0.5 smd: 1(0,0) 2(0,0.95) 3(0,1.9) 4(0,2.85) 5(0,3.8) 6(0,4.75) 7(0,5.7) 8(0,6.65)
  silkscreen extent -1.1,-1 4.17,7.5
JOY [mm]
  round 1 hole 1 unplated: 0(0,-1.9)
  round 0.7 hole 0.7 unplated: 0(0,1.9)
  rect 1.778x1.016 smd: 1(-3.1,1.4) 2(-3.1,0) 3(-3.1,-1.4) 4(3.1,-1.4) 5(3.1,0) 6(3.1,1.4)
  silkscreen extent -3.8,-3.7 3.8,4.1
KEC2740 [mm]
  round 1.27 hole 0.762: 1(-1,-0.95) 2(-1,0.95)
  silkscreen extent -3,-3 3,3
KS1508 [mil]
  round 60 hole 40: 1(-149.61,0) 2(149.61,0)
  silkscreen extent -295,-295 295,295
LCD12232-GB1 [mil]
  round 125.98 hole 125.98 unplated: 0(-1975.98,-1475) 0(1153.94,-1475)
  round 60 hole 30: 1(0,0) 2(100,0) 3(200,0) 4(300,0) 5(400,0) 6(500,0) 7(600,0) 8(700,0)
  silkscreen extent -2065,-1632 1243,100
LI1220_1 [mm]
  round 1.1 hole 1.1 unplated: 0(0,3.75)
  round 1.5 hole 1.5 unplated: 0(0.025,-3.75)
  oct 2.5x6 smd: 1(0,-8.6)
  oval 2.5x6 smd: 2(0,8.6)
  silkscreen extent -7.62,-7.57 7.62,7.57
MSD(PJS008) [mm]
  round 0.6 hole 0.7: 0(0,7.55) 0(0,0)
  rect 1.6x0.8 smd: 1(-5.8,1.475) 2(-5.8,2.575) 3(-5.8,3.675) 4(-5.8,4.775) 5(-5.8,5.875) 6(-5.8,6.975) 7(-5.8,8.075) 8(-5.8,9.175)
  rect 1.6x0.85 smd: 9(-5.8,10.325)
  rect 1.4x1.95 smd: 10(4.4,11.225)
  rect 3.5x1.6 smd: G1(-3.65,-3.4)
  rect 3.1x1.5 smd: G2(7.35,11.45)
  rect 3.5x1.4 smd: G3(7.35,-3.5)
  rect 3.1x1.2 smd: G4(-4.15,11.6)
  silkscreen extent -5.07,-3.81 10.8,11.43
PB10 [mil]
  rect 40x60 smd: 1(-87.5,177.17) 2(87.5,177.17) 3(87.5,-177.17) 4(-87.5,-177.17)
  silkscreen extent -125,-125 125,125
PJST-613 [mm]
  round 2 hole 1.2: 1(4.2,0) 10(12,0)
  round 2 hole 1.4: 2(11,-4)
  round 1.2 hole 1.2 unplated: G1(7.5,2) G2(7.5,-4)
  silkscreen extent -3.2,-5 12.6,3.5
polyzen [mm]
  rect 0.8x2.21 smd: 1(0,0)
  rect 0.7x0.94 smd: 2(3.429,0.635) 3(3.429,-0.635)
  silkscreen extent -0.38,-2.03 3.68,2.03
SAM(C816) [mm]
  rect 1.5x1.3 smd: 1(-12.3,-3.81) 2(-12.3,-1.27) 3(-12.3,1.27) 4(-12.3,3.81) 5(12.3,-3.81) 6(12.3,-1.27) 7(12.3,1.27) 8(12.3,3.81)
  rect 1.75x1 smd: 17(-5.5,8.89) 18(-5.5,11.43)
  round 2 hole 2.2 unplated: G0(-10.16,26.67) G0(10.16,-17.78)
  silkscreen extent -17,-26.73 17,29.14
SIP2 [mil]
  round 60 hole 40: 1(0,0) 2(100,0)
  silkscreen extent -50,-50 150,50
SIP3 [mil]
  rect 60x60 hole 40: 1(0,0)
  round 60 hole 40: 2(100,0) 3(200,0)
  silkscreen extent -50,-50 250,50
SM8 [mm]
  rect 1.9x1.3 smd: 1(-2.75,-1.6) 2(2.75,-1.6) 3(2.75,1.6) 4(-2.75,1.6)
  silkscreen extent -4.44,-1.91 4.44,1.91
SO8 [mil]
  rect 24x76 smd: 1(0,0) 2(50,0) 3(100,0) 4(150,0) 5(150,225) 6(100,225) 7(50,225) 8(0,225)
  silkscreen extent -30,60 180,160
SO28 [mil]
  rect 75x25 smd: 1(0,0) 2(0,-50) 3(0,-100) 4(0,-150) 5(0,-200) 6(0,-250) 7(0,-300) 8(0,-350) 9(0,-400) 10(0,-450) 11(0,-500) 12(0,-550) 13(0,-600) 14(0,-650) 15(400,-650) 16(400,-600) 17(400,-550) 18(400,-500) 19(400,-450) 20(400,-400) 21(400,-350) 22(400,-300) 23(400,-250) 24(400,-200) 25(400,-150) 26(400,-100) 27(400,-50) 28(400,0)
  silkscreen extent 80,-685 320,35
SOT-23 [mil]
  rect 36x36 smd: 1(37.5,-40) 2(-37.5,-40)
  rect 36x50 smd: 3(0.5,40)
  silkscreen extent -58,-45 58,45
SOT-666 [mm]
  rect 1.16x0.279 smd: 1(-0.795,0.5) 2(-0.795,0) 3(-0.795,-0.5) 4(0.795,-0.5) 5(0.795,0) 6(0.795,0.5)
  silkscreen extent -0.82,-0.88 0.82,0.88
TAN-B [mil]
  rect 50x100 smd: 1(-60,0) 2(60,0)
  silkscreen extent -120,-75 110,75
TP [mil]
  round 60 hole 40: 1(0,0)
  silkscreen extent -45,-45 45,45
TQFP100 [mm]
  rect 2.5x1.5 smd rot 45: 0(-8.06,8.06) 0(8.06,-8.06)
  rect 2.5x1.5 smd rot 135: 0(-8.06,-8.06) 0(8.06,8.06)
  round 1.5 hole 1.5 unplated: 0(0,5) 0(0,-5)
  rect 1.5x0.2 smd: 1(-7.725,6) 2(-7.725,5.5) 3(-7.725,5) 4(-7.725,4.5) 5(-7.725,4) 6(-7.725,3.5) 7(-7.725,3) 8(-7.725,2.5) 9(-7.725,2) 10(-7.725,1.5) 11(-7.725,1) 12(-7.725,0.5) 13(-7.725,0) 14(-7.725,-0.5) 15(-7.725,-1) 16(-7.725,-1.5) 17(-7.725,-2) 18(-7.725,-2.5) 19(-7.725,-3) 20(-7.725,-3.5) 21(-7.725,-4) 22(-7.725,-4.5) 23(-7.725,-5) 24(-7.725,-5.5) 25(-7.725,-6) 51(7.725,-6) 52(7.725,-5.5) 53(7.725,-5) 54(7.725,-4.5) 55(7.725,-4) 56(7.725,-3.5) 57(7.725,-3) 58(7.725,-2.5) 59(7.725,-2) 60(7.725,-1.5) 61(7.725,-1) 62(7.725,-0.5) 63(7.725,0) 64(7.725,0.5) 65(7.725,1) 66(7.725,1.5) 67(7.725,2) 68(7.725,2.5) 69(7.725,3) 70(7.725,3.5) 71(7.725,4) 72(7.725,4.5) 73(7.725,5) 74(7.725,5.5) 75(7.725,6)
  rect 0.2x1.5 smd: 26(-6,-7.725) 27(-5.5,-7.725) 28(-5,-7.725) 29(-4.5,-7.725) 30(-4,-7.725) 31(-3.5,-7.725) 32(-3,-7.725) 33(-2.5,-7.725) 34(-2,-7.725) 35(-1.5,-7.725) 36(-1,-7.725) 37(-0.5,-7.725) 38(0,-7.725) 39(0.5,-7.725) 40(1,-7.725) 41(1.5,-7.725) 42(2,-7.725) 43(2.5,-7.725) 44(3,-7.725) 45(3.5,-7.725) 46(4,-7.725) 47(4.5,-7.725) 48(5,-7.725) 49(5.5,-7.725) 50(6,-7.725) 76(6,7.725) 77(5.5,7.725) 78(5,7.725) 79(4.5,7.725) 80(4,7.725) 81(3.5,7.725) 82(3,7.725) 83(2.5,7.725) 84(2,7.725) 85(1.5,7.725) 86(1,7.725) 87(0.5,7.725) 88(0,7.725) 89(-0.5,7.725) 90(-1,7.725) 91(-1.5,7.725) 92(-2,7.725) 93(-2.5,7.725) 94(-3,7.725) 95(-3.5,7.725) 96(-4,7.725) 97(-4.5,7.725) 98(-5,7.725) 99(-5.5,7.725) 100(-6,7.725)
  silkscreen extent -13.69,-14.04 14.25,13.9
TSSOP8 [mm]
  rect 0.9x0.33 smd: 1(0,0) 2(0,-0.65) 3(0,-1.3) 4(0,-1.95) 5(4.5,-1.95) 6(4.5,-1.3) 7(4.5,-0.65) 8(4.5,0)
  silkscreen extent 0.89,-2.28 3.56,0.33
tssop8 [mm]
  rect 0.9x0.33 smd: 1(0,0) 2(0,-0.65) 3(0,-1.3) 4(0,-1.95) 5(4.5,-1.95) 6(4.5,-1.3) 7(4.5,-0.65) 8(4.5,0)
  silkscreen extent 0.89,-2.28 3.56,0.33
TSSOP16 [mm]
  rect 1.15x0.3 smd: 1(0,0) 2(0,-0.65) 3(0,-1.3) 4(0,-1.95) 5(0,-2.6) 6(0,-3.25) 7(0,-3.9) 8(0,-4.55) 9(6.4,-4.55) 10(6.4,-3.9) 11(6.4,-3.25) 12(6.4,-2.6) 13(6.4,-1.95) 14(6.4,-1.3) 15(6.4,-0.65) 16(6.4,0)
  silkscreen extent 0.94,-4.88 5.42,0.33
USB-B [mil]
  round 120 hole 95: 0(-291,-185) 0(189,-185)
  round 50 hole 30: 1(0,0) 2(-98,0) 3(-98,-80) 4(0,-80)
  silkscreen extent -365,-488 263,57
VB334 [mm]
  round 2 hole 1.3: 1(-3.125,3.125) 2(3.125,3.125) 3(3.125,-3.125) 4(-3.125,-3.125)
  round 2.032 hole 1.27: 5(0,0)
  silkscreen extent -5.5,-5.5 5.5,5.5
VDFPN8(8*6) [mm]
  rect 2.54x4.064 smd: 0(0,0)
  rect 1x0.5 smd: 1(-3.81,1.905) 2(-3.81,0.635) 3(-3.81,-0.635) 4(-3.81,-1.905) 5(3.81,-1.905) 6(3.81,-0.635) 7(3.81,0.635) 8(3.81,1.905)
  silkscreen extent -4,-3.04 4,3.01
XTAL1 [mil]
  round 70 hole 53: 1(0,0) 2(-200,0)
  silkscreen extent -315,-89 114,89

## Free pads (board coordinates)
  round 137.8 hole 137.8 unplated: 0(38375,50425) 0(38375,56775) 0(42425,50425) 0(42425,56775)

## Via types
v1: diameter 16, hole 8, TopLayer to BottomLayer, 577 vias
v2: diameter 50, hole 28, TopLayer to BottomLayer, 3 vias

## Nets (pads, with @x,y where several pads share a name; then routed paths per layer and width w, separated by ;. In a path a pad name is that pad's centre, name@x,y a point inside that pad or via, vN(x,y) a via of type N, cw(c..) or ccw(c..) an arc to the next point about the centre after c; other vN are vias at no path point)
+3V3: B2.1 B2.4 C7.2 C8.2 C13.1 C15.1 C16.1 C17.1 C26.1 C28.1 C30.2 C34.1 C65.1 C68.1 C70.1 CN7.1 CN7.2 CN9.1 CN10.1 CN12.48 CN14.28 CN15.4 JP9.1 JP11.3 R2.2 R11.2 R18.2 R21.1 R23.2 R27.1 R28.1 R29.2 R30.1 R36.2 R41.1 R42.2 R43.2 R44.2 R45.2 R47.1 R51.2 R52.2 R61.2 R66.2 R88.2 R89.2 R90.2 R91.2 R94.1 R95.1 R97.1 R98.2 R99.1 R100.1 R101.2 R103.2 R104.2 R105.2 R107.2 R122.2 RV1.3 SW1.1 SW2.1 T1.3 TP1.1 TR1.2 TR2.2 U3.3 U3.7 U3.8 U5.3 U7.2 U9.16 U10.16 U11.7 U13.6 U14.4 U17.9 U17.10 U17.13 U18.21 U19.2 | length 32203.3
  TopLayer w12: v1(38325,53150) C26.1@38390,53150 ; U11.7@38325,53375.59 v1@38424.41,53375.59 ; v1(38425,53300) C28.1@38472.5,53300 ; v1(38450,52900) R18.2@38450,52947.5 ; R28.1@38527.5,53450 v1(38575,53450) ; R23.2@38527.5,53525 v1(38575,53525) ; R27.1@38527.5,53700 v1(38575,53700) ; T1.3@38615,52799.5 v1(38615,52875) ; R30.1@39072.5,51725 39072.5,51772.5 v1(39075,51775) ; v1(39225,51575) U14.4@39225,51623.23 ; CN15.4@39387.01,56171.65 39387.01,56102.99 v1(39390,56100) ; v1(39475,55925) R98.2@39475,55972.5 ; R36.2@39577.5,51500 v1(39625,51500) ; C16.1@39602.5,53700 39650,53700 39701.97,53648.03 U10.16@39701.97,53625 ; C17.1@39602.5,54275 39650,54275 39701.97,54223.03 U9.16@39701.97,54200 ; B2.1@39622.83,50412.5 B2.4@39977.17,50412.5 ; v1(39650,51300) R2.2@39697.5,51300 ; v1(39650,51725) R52.2@39697.5,51725 ; C15.1@39675,52252.5 v1(39675,52300) ; v1(39675,52400) C13.1@39675,52490 ; R47.1@39752.5,51500 v1(39800,51500) ; v1(39900,55850) U3.3@39950,55850 ; v1(39950,51400) R100.1@39997.5,51400 ; v1(39950,51950) R97.1@39997.5,51950 ; R11.2@40052.5,56050 C7.2@40172.5,56050 ; U3.7@40250,55900 v1(40300,55900) ; U3.8@40250,55950 v1(40300,55950) ; R29.2@40427.5,52425 v1(40500,52425) ; U13.6@40502.17,52298.82 40551.18,52298.82 v1(40575,52275) 40625,52275 ; U18.21@40600,51550 C65.1@40747.5,51550 ; 40610,52275 40625,52260 ; C34.1@40625,52210 40625,52275 ; C30.2@40652.5,52325 40652.5,52302.5 40625,52275 ; v1(40700,51675) C68.1@40765,51675 ; R89.2@40775,52852.5 v1(40775,52900) ; R90.2@40775,53002.5 v1(40775,53050) ; R95.1@40802.5,51400 v1(40850,51400) ; R99.1@40802.5,51850 v1(40850,51850) ; R94.1@40802.5,51925 v1(40850,51925) ; U19.2@40850,52625 40850,52550 40827.5,52527.5 C70.1@40827.5,52475 R107.2@40897.5,52475 ; TR2.2@40860,52862.5 40885.51,52862.5 v1(40899,52876) ; TR1.2@40860,53012.5 v1(40860,53050) ; v1(40990,52800) R88.2@41022.5,52800 ; R45.2@41352.5,51250 v1(41400,51250) ; R44.2@41352.5,51325 v1(41400,51325) ; R43.2@41352.5,51400 v1(41400,51400) ; R41.1@41352.5,51475 v1(41400,51475) ; R42.2@41352.5,51550 v1(41400,51550) ; v1(41500,56325) R61.2@41500,56372.5 ; C8.2@41527.5,56050 U5.3@41625,56050 ; R66.2@41572.5,51475 v1(41572.5,51507.5) ; R51.2@41627.5,51400 v1(41675,51400) ; R91.2@41877.5,56250 v1(41925,56250) ; R21.1@41997.5,55950 41997.5,55997.5 v1(42000,56000) ; v1(42100,52900) R103.2@42147.5,52900 ; v1(42100,53100) R105.2@42147.5,53100 ; v1(42100,53300) R101.2@42147.5,53300 ; v1(42100,53400) R104.2@42147.5,53400 ; v1(42100,53500) R122.2@42147.5,53500
  TopLayer w30: U7.2@39375,52200 U7.2@39375,52650 ; U7.2@39495,52255 v2(39495,52495)
  VCC w12: v1(38325,53150) 38425,53150 38425,53750 38300,53875 38300,55975 38450,56125 39175,56125 39275,56025 39850,56025 39925,55950 41650,55950 41700,56000 v1(42000,56000) ; 38425,53450 v1(38575,53450) ; 38425,53530 38430,53525 v1(38575,53525) ; 38425,53700 v1(38575,53700) ; v1(38450,52900) 38475,52875 v1(38615,52875) ; CN12.48@39050,53400 39200,53550 39675,53550 ; v1(39075,51775) 39350,51775 v1(39625,51500) 40425,51500 40600,51675 ; v1(39225,51575) 39225,51775 ; 39270,53460 39485,53460 39760,53185 ; v1(39390,56100) 39400,56090 39400,56025 ; v1(39475,55925) 39475,56025 ; v2@39495,52500 39575,52500 v1(39675,52400) v1(39675,52300) 40550,52300 v1(40575,52275) 40650,52275 40850,52475 ; 39500,51625 39600,51725 v1(39650,51725) ; v1(39650,51300) 39700,51350 39700,51500 ; v1(39675,54250) 39675,53375 JP9.1@39875,53175 40125,53175 40225,53075 40225,52300 ; v1(39800,50412.5) 39975,50587.5 39975,51500 ; v1(39950,51400) 39975,51400 ; v1(39950,51950) 39950,52300 ; 39950,55850 39950,55950 ; 40150,56050 40225,56050 ; 40225,53025 TP1.1@40300,53025 ; 40225,55950 40225,56550 CN14.28@40300,56625 ; 40350,55900 40350,55950 ; 40500,52300 v1(40500,52425) ; v1(40675,51550) 40700,51575 v1(40700,51675) ; v1(40775,52900) 40875,52900 40975,52800 v1(40990,52800) ; v1(40775,53050) v1(40860,53050) ; v1(40850,51400) 40900,51450 40900,51675 ; 40850,51675 v1(40850,51925) ; JP11.3@40925,55725 40925,55950 ; SW1.1@40925.14,53900.14 SW2.1@40925.14,54025.14 ; v1(41400,51250) 41400,51675 ; v1(41500,56325) 41525,56300 41525,55950 ; 41525,56050 v1(41565,56050) ; v1(41572.5,51507.5) 41572.5,51672.5 ; 41600,53225 41875,53225 ; 41675,51675 v1(41675,51400) 41811.22,51400 U17.13@41823.94,51412.72 ; U17.9@41823.94,51612.72 U17.10@41923.94,51612.72 41915,51612.72 U17.10@41927.28,51625 ; 41875,53350 42050,53350 v1(42100,53300) ; 41875,53400 v1(42100,53400) ; 41875,53600 CN7.2@42475,53600 ; 41875,56000 41875,53125 42030,52970 ; 41880,53500 v1(42100,53500) ; 41880,54925 CN9.1@42100,54925 42175,55000 42300,55000 CN10.1@42375,54925 ; 41925,56000 v1(41925,56250) ; 42001.25,52998.75 42001.25,53001.25 v1(42100,53100) ; 42030,52900 v1(42100,52900)
  VCC w30: 39105,53455 39270,53455
  BottomLayer w12: v1(38615,52875) 38675,52875 39050,52500 v2(39375,52500)
  other v1: 38425,53375 39675,53675 40125,56050
+5V: C10.2 C14.1 C63.1 C67.1 C69.1 CN14.25 JP4.1 JP4.3 JP4.5 R16.2 R17.2 R22.2 R106.1 TP2.1 U4.8 U7.3 U18.6 | length 12066.6
  TopLayer w12: JP4.5@39575,53175 39650,53250 39650,53275 39677.5,53302.5 R22.2@39700,53302.5 ; C63.1@40052.5,51625 40125,51625 40150,51650 U18.6@40200,51650 ; C69.1@40052.5,51700 v1(40100,51700) ; C67.1@40060,51825 v1(40125,51825) ; v1(40975,52875) R16.2@41022.5,52875 ; v1(40990,52950) R17.2@41022.5,52950 ; R106.1@41297.5,52475 41297.5,52437.5 v1(41300,52435) ; C10.2@41352.5,53050 v1(41400,53050) 41425,53025 U4.8@41425,52950
  TopLayer w20: C14.1@39105,52925 39235,52925 39275,52965 TP2.1@39275,53000
  TopLayer w30: v2(39275,52550) U7.3@39275,52648.82
  VCC w12: JP4.5@39575,53175 JP4.1@39375,53175 39275,53075 39275,52150 39650,51775 40575,51775 ; 40125,51775 v1(40125,51825) ; v1(40975,52875) 40975,52935 v1(40990,52950) 41300,52950 ; 41261.01,52461.01 41263.99,52461.01 41290,52435 v1(41300,52435) ; 41300,52500 41300,52950 ; v1(41400,53050) 41300,52950
  VCC w15: v1(40100,51625) 40100,51775
  VCC w20: 40490,51875 40580,51875 ; 40499.8,51825 40590,51825 ; 41200,52575 41200,52695 ; 41400,52565 41400,52725
  BottomLayer w20: TP2.1@39275,53000 38675,53000 38325,53350 38325,56590 38610,56875 40250,56875 CN14.25@40400,56725
BOOT0: R87.1 U1.94 | length 1287.2
  TopLayer w7: U1.94@40604.13,54618.11 v1(41151.89,54618.11) ; v1(41150,54100) 41277.5,54100 41327.5,54050 R87.1@41327.5,54025
  BottomLayer w7: v1(41150,54100) v1@41150,54616.22
D5V: CN12.49 CN13.19 JP4.4 | length 3130.7
  VCC w30: 38825,53425 39025,53225 39100,53225 39225,53350 39400,53350 JP4.4@39475,53275 ; 38825,55725 38900,55800 ; 39935,55540 41230,55540 41525,55245 41525,54925 CN13.19@41650,54800
DBGACK: CN7.19 R111.1 | length 172.5
  TopLayer w7: R111.1@42202.5,52700 CN7.19@42375,52700
DBGRQ: CN7.17 R110.1 | length 172.5
  TopLayer w7: R110.1@42202.5,52800 CN7.17@42375,52800
E5V: C12.1 JP4.6 U8.3 | length 2397
  TopLayer w30: v1(38675,51925) C12.1@38770,51925
  VCC w20: 39145,52390 39145,52615
  VCC w30: U8.3@38276.57,51701.57 38276.57,51573.43 38350,51500 38650,51500 39150,52000 ; v1(38675,51925) 38800,51925 38937.06,51787.94 38937.94,51787.94 ; 39150,53050 39325,53225 39525,53225 JP4.6@39575,53275